# EAGLE board apc_v3 (EAGLE 5.10)
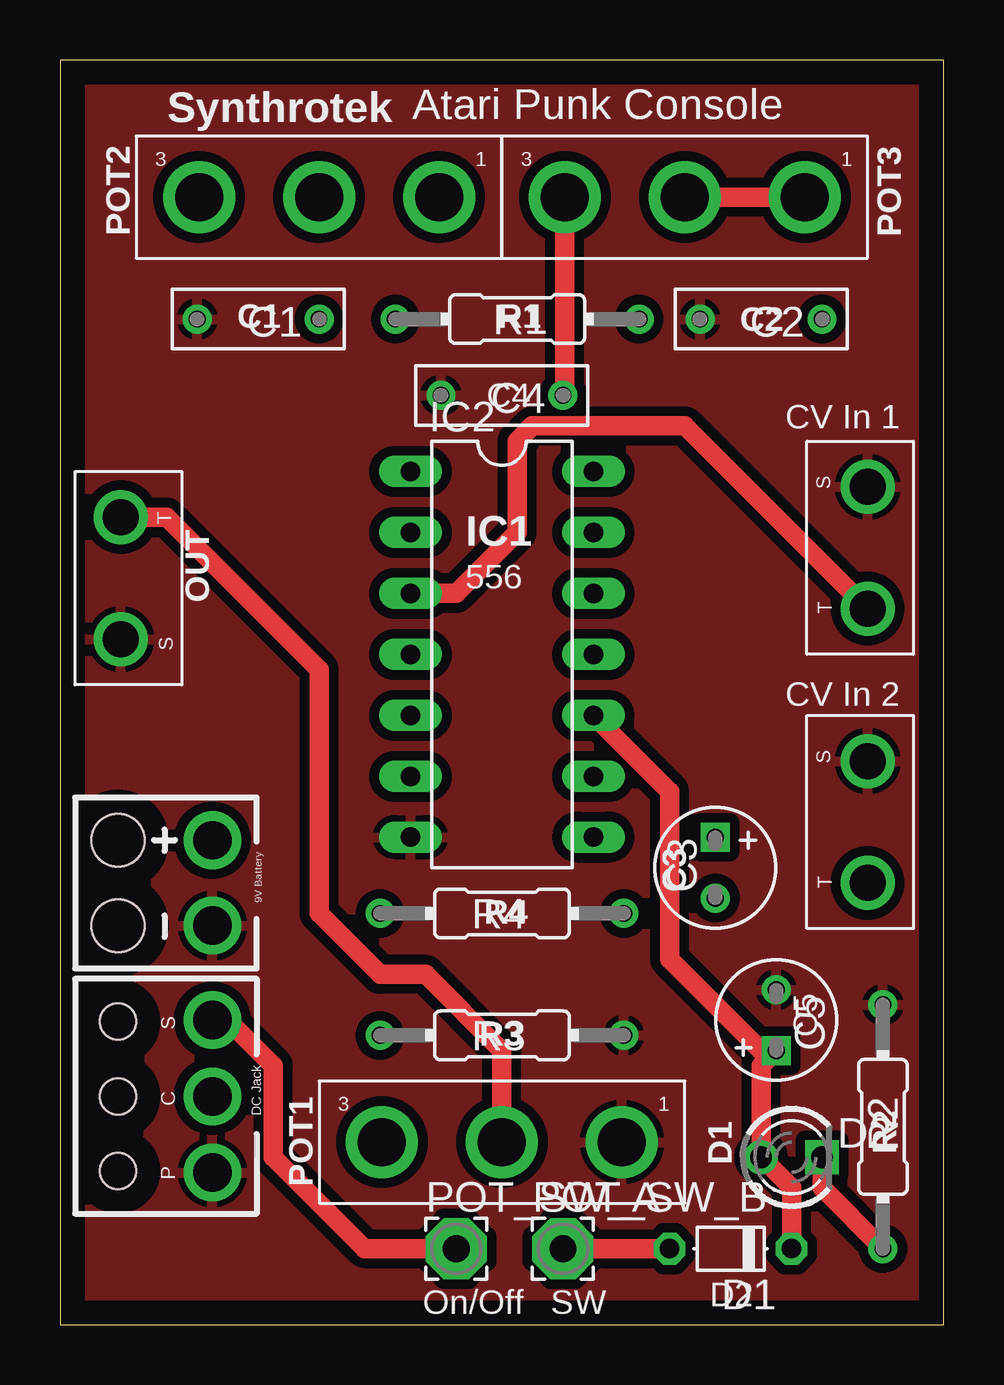
[diagram p0: board, top side]
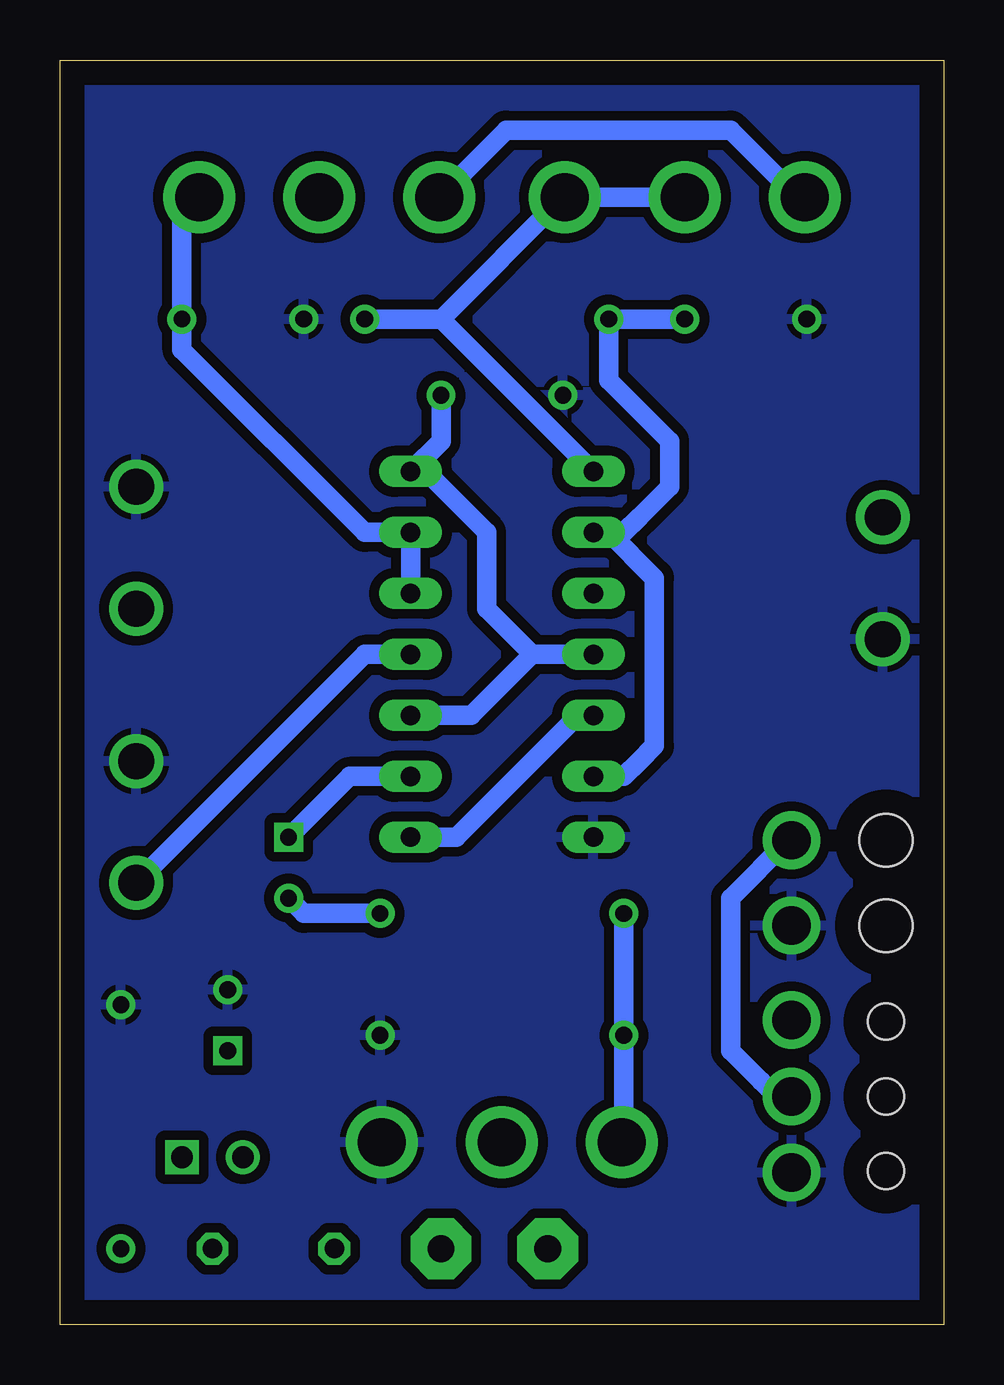
[diagram p1: board, bottom side, seen from below]

Size 36.83 x 52.7 mm. Coordinates in mm from the lower left corner, seen from the top.
Outline: 0,0 36.83,0 36.83,52.7 0,52.7 0,0
Copper layers (1*16): Top 0.035mm / dielectric 1.5mm / Bottom 0.035mm
Design rules "default": minimum track width 10mil, minimum drill 24mil, track to track 8mil, track to pad 8mil, pad to pad 8mil, via to via 8mil, smd to smd 8mil, copper to edge 40mil, drill to drill 8mil, minimum pad ring 10mil, minimum via ring 8mil, stop-mask expansion 4mil, vias tented up to drill 0mil, thermal gap 10mil

## Footprints (pad centres in the part's own frame; a part is rotated, then mirrored left to right if it is on the bottom)
072X025 = drill 0.7 round: 1 -2.54,0; 2 2.54,0
050_020_1 = drill 0.7 square: + -1.27,0 | drill 0.7 round: - 1.27,0
MONO_JACK = drill 1.5 round: SLEEVE 2.54,0; TIP -2.54,0
D-5 = drill 0.813 octagon: A 2.54,0; C -2.54,0
LED3MM = drill 0.9 round: A -1.27,0 | drill 0.9 square: K 1.27,0
DIL14 = drill 0.813 long: 1 -7.62,-3.81; 2 -5.08,-3.81; 3 -2.54,-3.81; 4 0,-3.81; 5 2.54,-3.81; 6 5.08,-3.81; 7 7.62,-3.81; 8 7.62,3.81; 9 5.08,3.81; 10 2.54,3.81; 11 0,3.81; 12 -2.54,3.81; 13 -5.08,3.81; 14 -7.62,3.81
POT = drill 2 round: 1 -5,0; 2 0,0; 3 5,0
2,54/1,1 = drill 1.118 pad 2.54 octagon: 1 0,0
R0207/4 = drill 0.7 round: 1 -5.08,0; 2 5.08,0
DC_JACK_OFFBOARD = drill 1.6 round: CONNECT 0,1.27; PIN 3.175,1.27; SLEEVE -3.175,1.27 | hole 1.5: -3.111,-2.667; 0,-2.667; 3.111,-2.667
9V_BATTERY = drill 1.6 round: 9V_BATTERY_+ -1.778,1.27; 9V_BATTERY_- 1.778,1.27 | hole 2.2: -1.778,-2.667; 1.778,-2.667

## Placement (x,y rotation side)
C1  0.01uF  [072X025]  8.26,41.91 180 top
C2  0.1uF  [072X025]  29.21,41.91 180 top
C3  10uF  [050_020_1]  27.3,19.05 270 top
C4  0.1uF  [072X025]  18.41,38.73 180 top
C5  10uF  [050_020_1]  29.84,12.7 90 top
CV_IN_1  MONO_JACK  [MONO_JACK]  33.66,20.95 90 top
CV_IN_2  MONO_JACK  [MONO_JACK]  33.66,32.38 90 top
D1  [D-5]  27.94,3.17 180 top
D2  LED3MM  [LED3MM]  30.48,6.99 0 top
IC2  LM556N  [DIL14]  18.41,27.94 270 top
OUT  MONO_JACK  [MONO_JACK]  2.54,31.11 270 top
POT1  [POT]  18.41,7.62 180 top
POT2  500k  [POT]  10.79,46.99 180 top
POT3  500k  [POT]  26.04,46.99 180 top
POT_SW_A  [2,54/1,1]  16.51,3.17 0 top
POT_SW_B  [2,54/1,1]  20.95,3.17 0 top
R1  1k  [R0207/4]  19.05,41.91 180 top
R2  1k  [R0207/4]  34.29,8.26 270 top
R3  4.7k  [R0207/4]  18.41,12.06 0 top
R4  10k  [R0207/4]  18.41,17.14 0 top
U$1  DC_JACK_OFFBOARD  [DC_JACK_OFFBOARD]  5.08,9.53 270 top
U$2  9V_BATTERY_CLIP  [9V_BATTERY]  5.08,18.41 270 top

## Library data of the parts
C1 C2 C4 = gm-caps-film-box
C3 C5 = gm-caps-electro-pol
CV_IN_1 CV_IN_2 OUT POT1-POT3 U$1 U$2 = 00_steve
D1 = diode
D2 = gm-diodes
IC2 = linear
POT_SW_A POT_SW_B = wirepad
R1-R4 = gm-resistors

## Nets
+9V: C4.1 C5.+ D1.C D2.A IC2.4 IC2.10 IC2.14 POT2.3 POT3.3
C3: C3.+ IC2.9
GND: C1.2 C2.2 C4.2 C5.- CV_IN_1.SLEEVE CV_IN_2.SLEEVE IC2.7 OUT.SLEEVE POT1.1 R2.1 R3.2 U$1.PIN U$2.9V_BATTERY_-
N$1: D2.K R2.2
N$2: C1.1 IC2.2 IC2.6 R1.2
N$3: IC2.1 POT2.1 POT2.2 R1.1
N$4: POT_SW_A.1 U$1.SLEEVE
N$5: IC2.5 IC2.8
N$6: C2.1 IC2.12 IC2.13 POT3.1 POT3.2
N$7: C3.- R4.2
N$8: POT1.3 R3.1 R4.1
N$9: CV_IN_1.TIP IC2.11
N$10: OUT.TIP POT1.2
N$12: U$1.CONNECT U$2.9V_BATTERY_+
N$13: D1.A POT_SW_B.1
N$14: CV_IN_2.TIP IC2.3

## Tracks (layer width: path | path; a pad name or v marks a point on that pad's centre or on a via)
+9V
  Top 0.813: D1.C 30.48,5.71 D2.A 29.21,10.79 C5.+ 29.21,11.43 25.4,15.24 25.4,22.23 IC2.10 | POT3.3 21.04,38.81 C4.1
  Bottom 0.813: 17.14,27.94 IC2.4 | 17.14,27.94 19.68,25.4 IC2.10 | 17.14,27.94 19.05,29.84 19.05,33.02 21.59,35.56 IC2.14 20.95,36.83 C4.1 | POT2.3 6.1,46.99 8.89,49.78 18.24,49.78 POT3.3
C3
  Bottom 0.813: IC2.9 24.77,22.86 C3.+
GND
  pour Bottom (isolate 0.406): 0,52.7 36.83,52.7 36.83,0 0,0
  pour Top (isolate 0.406): 0,52.7 36.83,52.7 36.83,0 0,0
N$1
  Top 0.813: D2.K 31.75,5.71 R2.2
N$2
  Bottom 0.813: C1.1 R1.2 13.97,39.37 11.43,36.83 11.43,34.92 12.7,33.66 13.34,33.02 IC2.2 13.97,33.02 12.06,31.11 12.06,24.13 12.7,23.5 13.34,22.86 IC2.6
N$3
  Bottom 0.813: POT2.2 POT2.1 15.88,46.99 20.95,41.91 | 20.95,41.91 R1.1 20.95,41.91 | IC2.1 20.95,41.91
N$4
  Top 0.813: U$1.SLEEVE 6.99,12.7 8.89,10.79 8.89,6.99 12.7,3.17 POT_SW_A.1
N$5
  Bottom 0.813: IC2.8 20.32,20.32 15.24,25.4 IC2.5
N$6
  Top 0.813: POT3.1 POT3.2
  Bottom 0.813: POT3.1 31.75,46.27 C2.1 31.75,40.64 24.13,33.02 IC2.13 IC2.12
N$7
  Bottom 0.813: C3.- 26.67,17.14 R4.2
N$8
  Bottom 0.813: R4.1 R3.1 13.34,7.7 POT1.3
N$9
  Bottom 0.813: CV_IN_1.TIP 24.13,27.94 IC2.11
N$10
  Top 0.813: OUT.TIP 4.45,33.66 10.79,27.3 10.79,17.14 13.34,14.61 15.24,14.61 18.41,11.43 POT1.2
N$12
  Bottom 0.813: U$2.9V_BATTERY_+ 6.48,20.19 8.89,17.78 8.89,11.43 7.62,10.16 6.99,9.53 U$1.CONNECT
N$13
  Top 0.813: POT_SW_B.1 D1.A
N$14
  Top 0.813: IC2.3 16.51,30.48 19.05,33.02 19.05,36.83 19.68,37.47 26.04,37.47 CV_IN_2.TIP

## Text on the board
tPlace: Synthrotek | Atari Punk Console | C1 | R1 | C2 | C4 | CV In 1 | IC1 | 556 | CV In 2 | C3 | R4 | R3 | C5 | R2 | D1 | D2 | On/Off | SW